# EAGLE board OpenBookReader v109 (EAGLE 9.7.0)
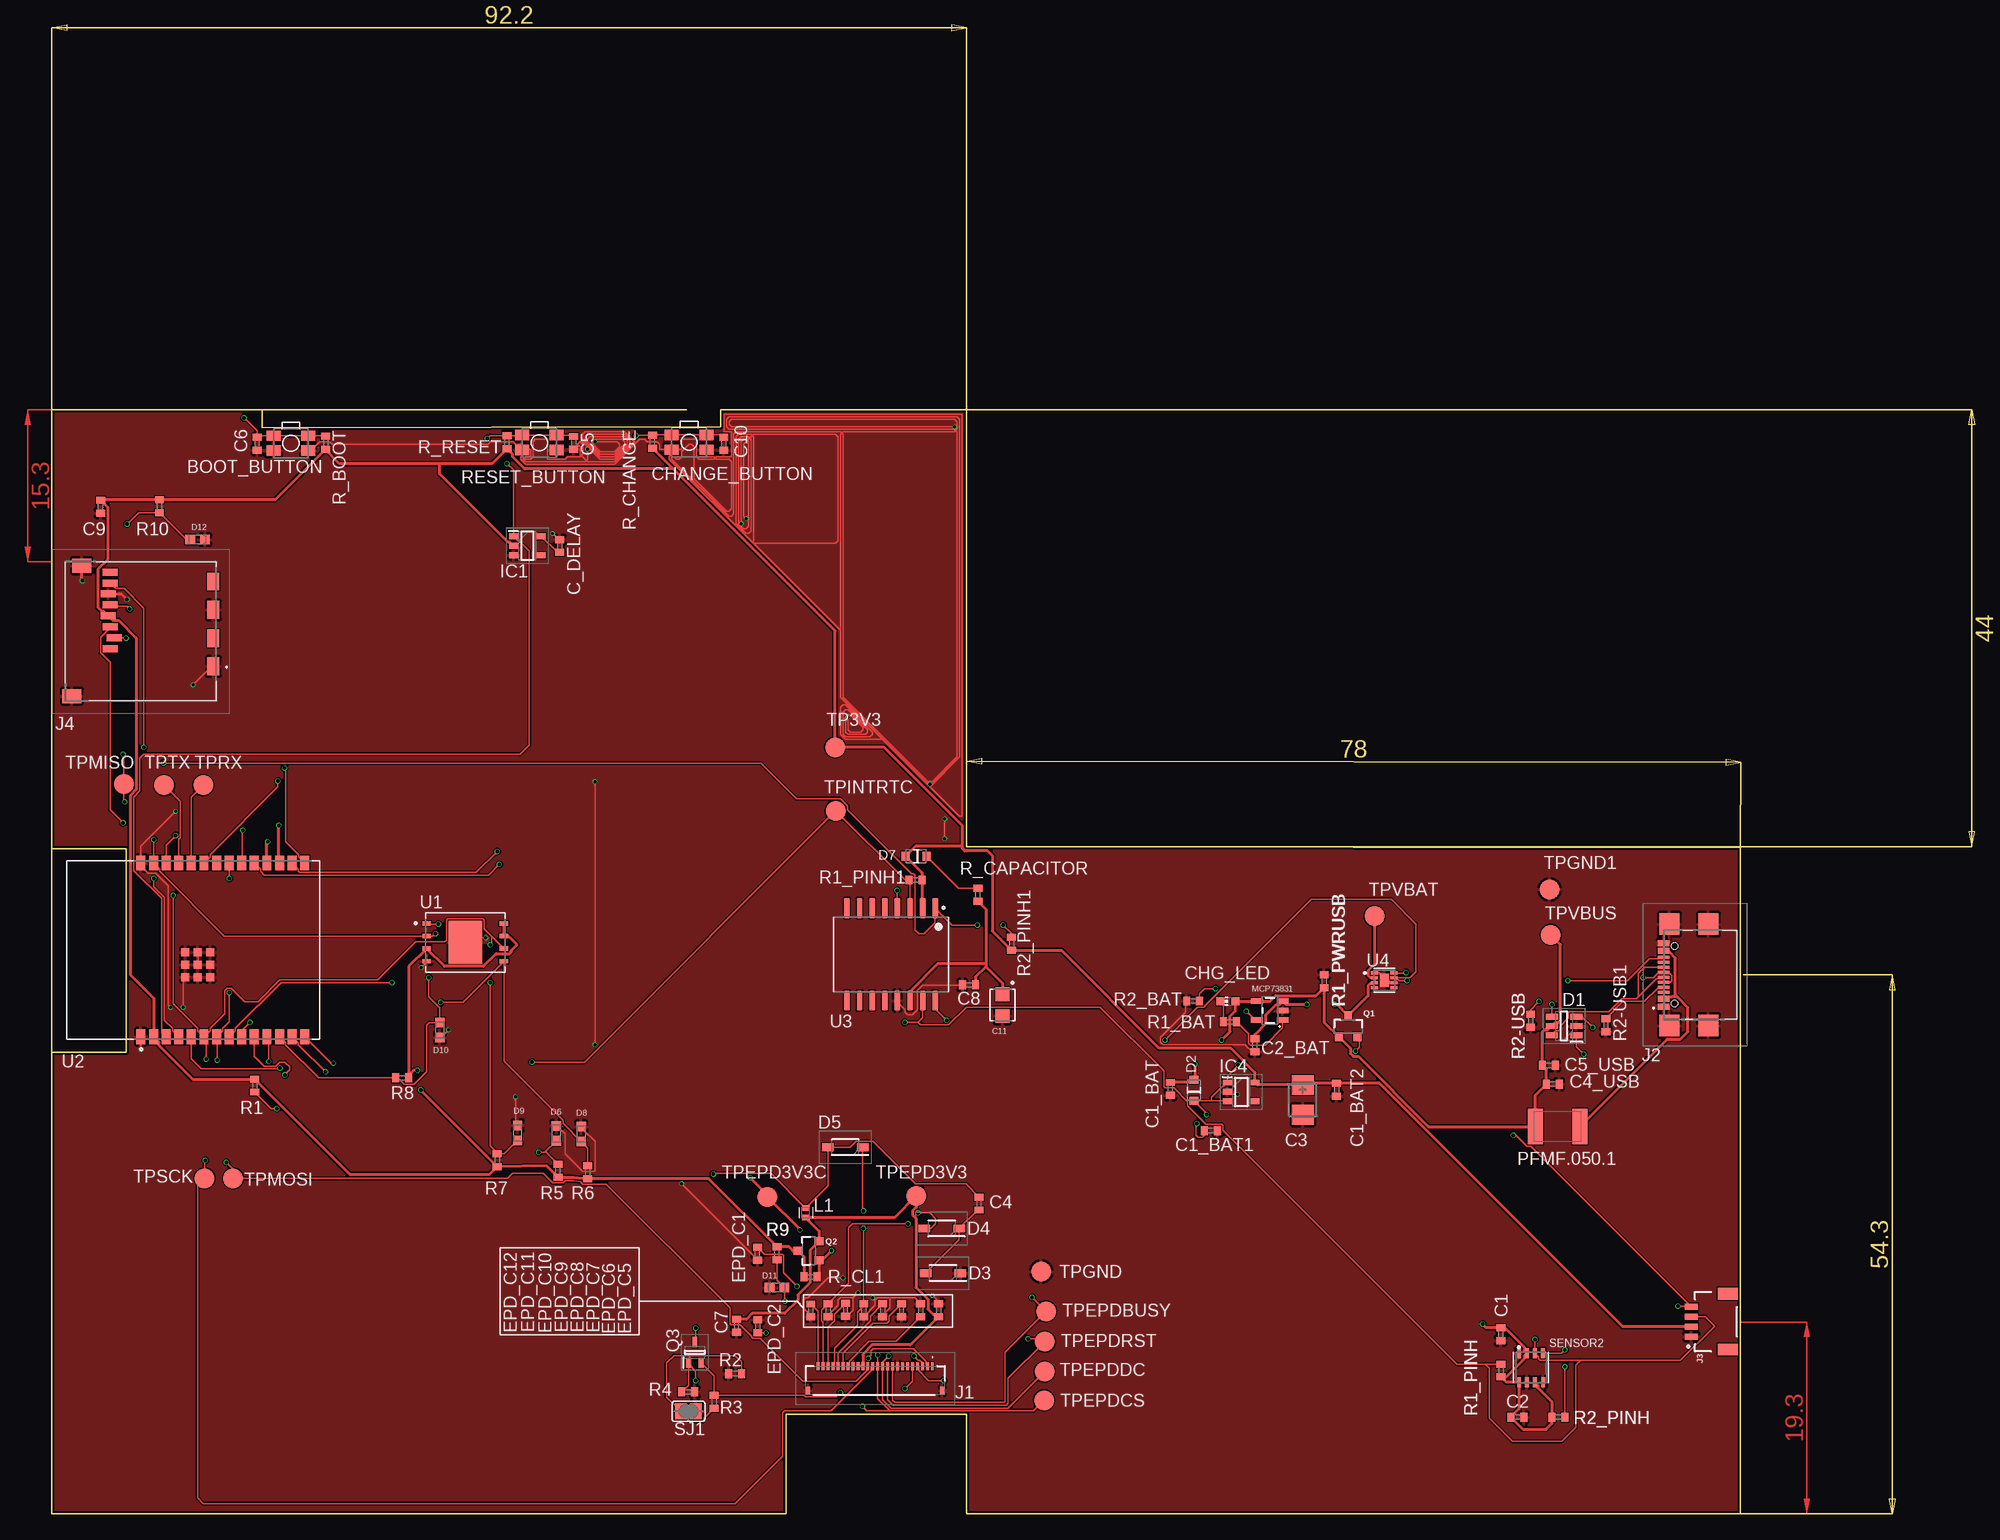
[diagram p0: board, top side]
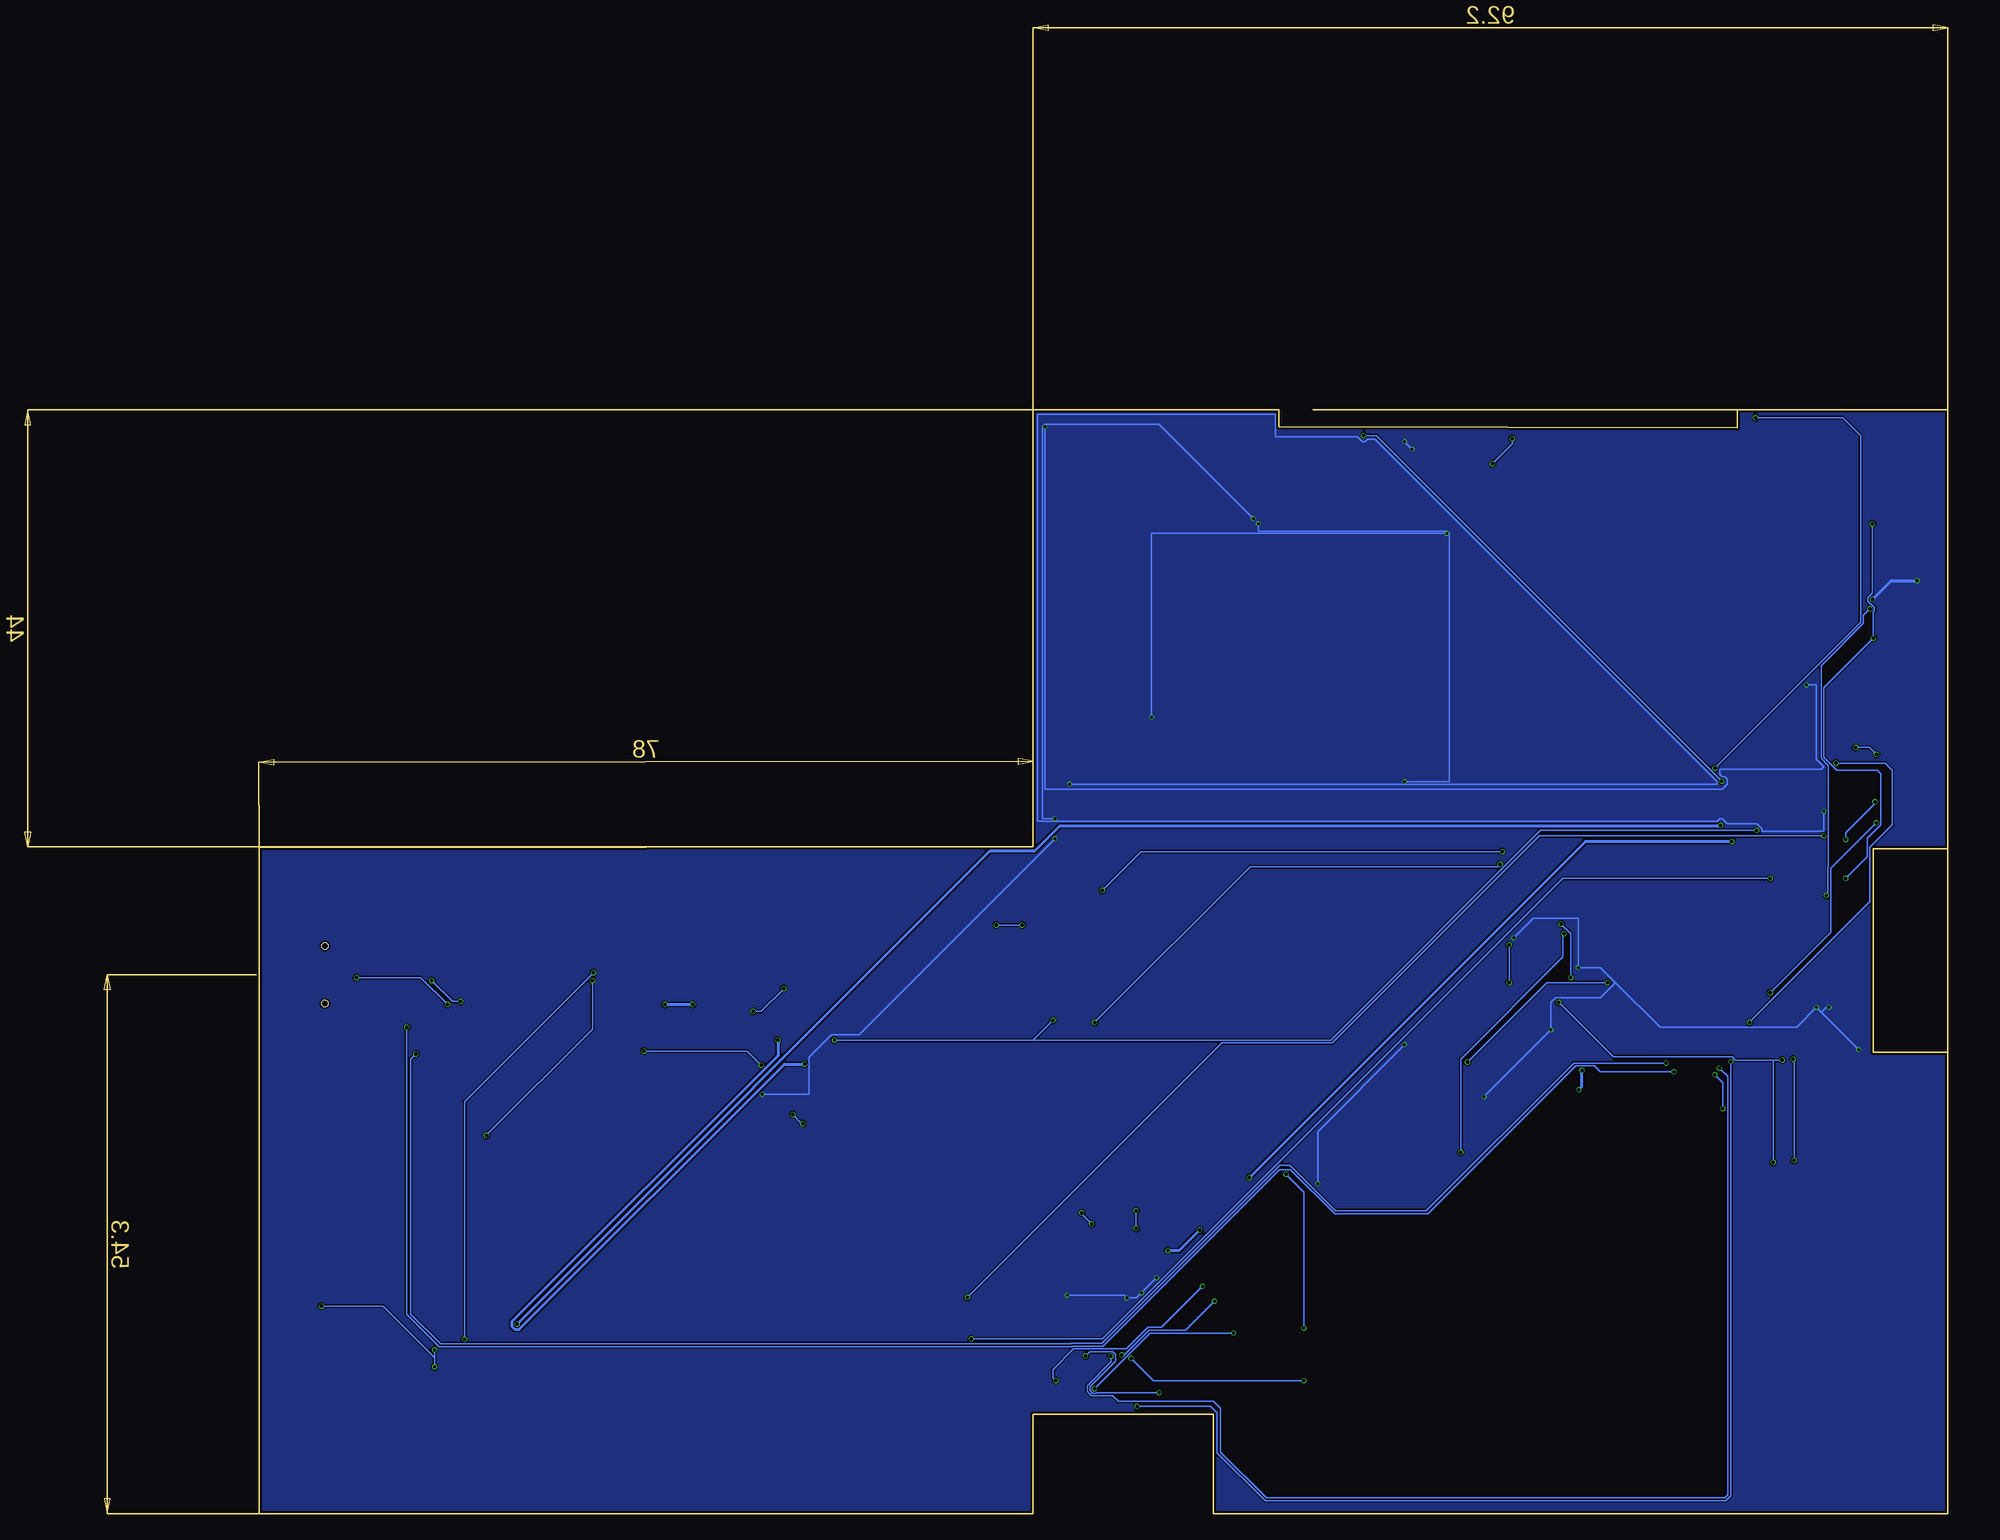
[diagram p1: board, bottom side, seen from below]

Size 170.2 x 111.2 mm. Coordinates in mm from the lower left corner, seen from the top.
Outline: 0,46.5 0,0 74,0 74,10 92.2,10 92.2,0 170.2,0 170.2,67.1 92.2,67.2 92.2,111.2 67.4,111.2 67.4,109.5 21.2,109.4 21.2,111.2 0,111.2 0,67
Outline: 0,46.5 7.5,46.5 7.5,67 0,67
Outline: 0,46.5 0,67
Copper layers (1*16): Top 0.035mm / dielectric 1.6mm / Bottom 0.035mm
Design rules "jlcpcb-2layers.dru": minimum track width 5mil, minimum drill 0.3mm, track to track 5mil, track to pad 5mil, pad to pad 5mil, via to via 5mil, smd to smd 5mil, copper to edge 0.2mm, drill to drill 6mil, minimum pad ring 10mil, minimum via ring 3mil, stop-mask expansion 4mil, vias tented up to drill 0mil, thermal gap 10mil

## Footprints (pad centres in the part's own frame; a part is rotated, then mirrored left to right if it is on the bottom)
MYBUTTON = smd 1.4 x 1.05: 1 1.75,0.75; 2 -1.75,0.75; 3 -1.75,-0.75; 4 1.75,-0.75
EAGLE-LTSPICE_C0402 = smd 0.7 x 0.9: 1 -0.65,0; 2 0.65,0
RCL_CT3528 = smd 2 x 2.2: + -1.5,0; - 1.5,0
CAPCP3225X100N = smd 1.4 x 1.4: 1 -1.1,0; 2 1.1,0
ADAFRUIT_CHIP-LED0603 = smd 0.8 x 0.8: A 0,-0.75; C 0,0.75
SOT95P280X145-6N = smd 1.2 x 0.6: 1 -1.25,0.95; 2 -1.25,0; 3 -1.25,-0.95; 4 1.25,-0.95; 5 1.25,0; 6 1.25,0.95
ESP32_WROVER_AVX---SD0805S020S1R0_AVX_SD0805S020S1R0_0 = smd 0.8 x 0.9: 1 -1.05,0; 2 1.05,0
SOD3716X135N = smd 1.15 x 0.8: 1 -1.75,0; 2 1.75,0
DIOC1608X36N = smd 0.97 x 0.94: 1 -0.75,0; 2 0.75,0
SOT95P280X125-5N = smd 0.9 x 0.6: 1 -1.4,0.95; 2 -1.4,0; 3 -1.4,-0.95; 4 1.4,-0.95; 5 1.4,0.95
SOT95P280X120-5N = smd 0.9 x 0.6: 1 -1.4,0.95; 2 -1.4,0; 3 -1.4,-0.95; 4 1.4,-0.95; 5 1.4,0.95
FH34SRJ24S05SH99 = smd 0.3 x 0.8: 1 5.75,1.45; 2 5.25,1.45; 3 4.75,1.45; 4 4.25,1.45; 5 3.75,1.45; 6 3.25,1.45; 7 2.75,1.45; 8 2.25,1.45; 9 1.75,1.45; 10 1.25,1.45; 11 0.75,1.45; 12 0.25,1.45; 13 -0.25,1.45; 14 -0.75,1.45; 15 -1.25,1.45; 16 -1.75,1.45; 17 -2.25,1.45; 18 -2.75,1.45; 19 -3.25,1.45; 20 -3.75,1.45; 21 -4.25,1.45; 22 -4.75,1.45; 23 -5.25,1.45; 24 -5.75,1.45 | smd 0.4 x 0.8: MP1 6.75,-1.05; MP2 -6.75,-1.05
SAMACSYS_PARTS_USB4110GFA = smd 0.3 x 1.15: A1 -3.35,3.678; A4 -2.55,3.678; A5 -1.25,3.678; A6 -0.25,3.678; A7 0.25,3.678; A8 1.25,3.678; A9 2.55,3.678; A12 3.35,3.678; B1 3.05,3.678; B4 2.25,3.678; B5 1.75,3.678; B6 0.75,3.678; B7 -0.75,3.678; B8 -1.75,3.678; B9 -2.25,3.678; B12 -3.05,3.678 | smd 2.18 x 2: MP1 -5.11,-0.827; MP2 5.11,-0.827; MP3 -5.11,3.103; MP4 5.11,3.103 | hole 0.65: -2.89,2.603; 2.89,2.603
JST04_1MM_RA = smd 0.6 x 1.35: 1 -1.5,0; 2 -0.5,0; 3 0.5,0; 4 1.5,0 | smd 1.2 x 2: NC1 2.8,-3.675; NC2 -2.8,-3.675
112ATAARR03ATTEND = smd 1.8 x 1.2: G1 10.6,10.4; G2 4.9,10.4; S1 7.75,10.4; S2 2.05,10.4 | smd 1.4 x 1.9: G3 13.6,-3.85; G4 0.45,-2.85 | smd 0.7 x 1.5: P1 8.8,0; P2 7.7,0.4; P3 6.6,0; P4 5.5,-0.2; P5 4.4,0; P6 3.3,-0.2; P7 2.2,0; P8 1.1,0
INDC1006X60N = smd 0.56 x 0.729: 1 -0.485,0; 2 0.485,0
ESP32_WROVER_SPARKFUN-IC-POWER_SOT23-5 = smd 0.55 x 1.2: 1 -0.95,-1.3; 2 0,-1.3; 3 0.95,-1.3; 4 0.95,1.3; 5 -0.95,1.3
ESP32C6_VARISTOR_CT/CN1812 = smd 1.5 x 3.6: 1 -2.25,0; 2 2.25,0
ESP32_WROVER_SPARKFUN-DISCRETESEMI_SOT23-3 = smd 0.8 x 0.9: 1 -0.95,-1; 2 0.95,-1; 3 0,1.1
SOT65P210X110-3N = smd 1.05 x 0.5: 1 -1.05,0.65; 2 -1.05,-0.65; 3 1.05,0
ESP32_WROVER_EAGLE-LTSPICE_R0402 = smd 0.7 x 0.9: 1 -0.65,0; 2 0.65,0
ESP32_WROVER_BME680_PSON80P300X300X100-8N = smd 1.016 x 0.5: 1 1.458,1.2; 2 1.458,0.4; 3 1.458,-0.4; 4 1.458,-1.2; 5 -1.458,-1.22; 6 -1.458,-0.4; 7 -1.458,0.4; 8 -1.458,1.2
SJ = smd 1.168 x 1.6: 1 -0.762,0; 2 0.762,0
TP20R = smd 2 x 2: TP 0,0
SON127P600X800X80-9N = smd 0.94 x 0.44: 1 -3.895,1.905; 2 -3.895,0.635; 3 -3.895,-0.635; 4 -3.895,-1.905; 5 3.895,-1.905; 6 3.895,-0.635; 7 3.895,0.635; 8 3.895,1.905 | smd 3.4 x 4.3: 9 0,0
XCVR_ESP32-C6-WROOM-1-N8 = smd 1.5 x 0.9: 1 -8.75,5.26; 2 -8.75,3.99; 3 -8.75,2.72; 4 -8.75,1.45; 5 -8.75,0.18; 6 -8.75,-1.09; 7 -8.75,-2.36; 8 -8.75,-3.63; 9 -8.75,-4.9; 10 -8.75,-6.17; 11 -8.75,-7.44; 12 -8.75,-8.71; 13 -8.75,-9.98; 14 -8.75,-11.25; 15 8.75,-11.25; 16 8.75,-9.98; 17 8.75,-8.71; 18 8.75,-7.44; 19 8.75,-6.17; 20 8.75,-4.9; 21 8.75,-3.63; 22 8.75,-2.36; 23 8.75,-1.09; 24 8.75,0.18; 25 8.75,1.45; 26 8.75,2.72; 27 8.75,3.99; 28 8.75,5.26 | smd 0.8 x 0.8: 29_1 -2.755,0.79; 29_2 -1.505,0.79; 29_3 -0.255,0.79; 29_4 -2.755,-0.46; 29_5 -1.505,-0.46; 29_6 -0.255,-0.46; 29_7 -2.755,-1.71; 29_8 -1.505,-1.71; 29_9 -0.255,-1.71
SOIC127P1032X265-16N = smd 2.05 x 0.59: 1 -4.655,4.445; 2 -4.655,3.175; 3 -4.655,1.905; 4 -4.655,0.635; 5 -4.655,-0.635; 6 -4.655,-1.905; 7 -4.655,-3.175; 8 -4.655,-4.445; 9 4.655,-4.445; 10 4.655,-3.175; 11 4.655,-1.905; 12 4.655,-0.635; 13 4.655,0.635; 14 4.655,1.905; 15 4.655,3.175; 16 4.655,4.445
SON50P200X200X80-9N = smd 0.76 x 0.27: 1 -0.985,0.75; 2 -0.985,0.25; 3 -0.985,-0.25; 4 -0.985,-0.75; 5 0.985,-0.75; 6 0.985,-0.25; 7 0.985,0.25; 8 0.985,0.75 | smd 0.9 x 1.3: 9 0,0

## Placement (x,y rotation side)
BOOT_BUTTON  BUTTON_CUSYOMV1  [MYBUTTON]  24.12,107.85 180 top
C1  100nF  [EAGLE-LTSPICE_C0402]  146.03,18.08 270 top
C1_BAT  4.7uF  [EAGLE-LTSPICE_C0402]  112.75,42.79 270 top
C1_BAT1  4.7uF  [EAGLE-LTSPICE_C0402]  116.85,38.59 0 top
C1_BAT2  4.7uF  [EAGLE-LTSPICE_C0402]  129.49,42.71 270 top
C2  100nF  [EAGLE-LTSPICE_C0402]  147.7,9.73 0 top
C2_BAT  4.7uF  [EAGLE-LTSPICE_C0402]  121.25,47.18 270 top
C3  100uF TANT  [RCL_CT3528]  126.1,41.69 270 top
C4  4.7uF/25V  [EAGLE-LTSPICE_C0402]  93.46,31.24 90 top
C4_USB  100nF  [EAGLE-LTSPICE_C0402]  151.28,43.27 0 top
C5  1uF  [EAGLE-LTSPICE_C0402]  52.61,107.87 270 top
C5_USB  4.7uF  [EAGLE-LTSPICE_C0402]  150.89,45.17 0 top
C6  100nF  [EAGLE-LTSPICE_C0402]  20.72,107.81 270 top
C7  10uF  [EAGLE-LTSPICE_C0402]  69.03,18.93 270 top
C8  100nF  [EAGLE-LTSPICE_C0402]  92.44,53.27 180 top
C9  100nF  [EAGLE-LTSPICE_C0402]  4.93,101.46 270 top
C10  100nF  [EAGLE-LTSPICE_C0402]  67.74,107.81 270 top
C11  CPH3225A  [CAPCP3225X100N]  95.82,51.24 270 top
C_DELAY  100nF  [EAGLE-LTSPICE_C0402]  51.21,97.49 90 top
CHANGE_BUTTON  BUTTON_CUSYOMV1  [MYBUTTON]  64.24,107.94 180 top
CHG_LED  [ADAFRUIT_CHIP-LED0603]  118.55,51.64 90 top
D1  USBLC6-2SC6Y  [SOT95P280X145-6N]  152.42,49.13 180 top
D2  ESP32_WROVER_AVX---SD0805S020S1R0_AVX_SD0805S020S1R0_0_0AVX_SD0805S020S1R0_0_0  [ESP32_WROVER_AVX---SD0805S020S1R0_AVX_SD0805S020S1R0_0]  115.12,42.65 90 top
D3  MBR0530  [SOD3716X135N]  89.84,24.23 180 top
D4  MBR0530  [SOD3716X135N]  89.7,28.73 180 top
D5  MBR0530  [SOD3716X135N]  79.98,36.92 180 top
D6  PGB1010603MR  [DIOC1608X36N]  50.87,38.32 270 top
D7  ESP32_WROVER_AVX---SD0805S020S1R0_AVX_SD0805S020S1R0_0_0AVX_SD0805S020S1R0_0_0  [ESP32_WROVER_AVX---SD0805S020S1R0_AVX_SD0805S020S1R0_0]  87.1,66.22 180 top
D8  PGB1010603MR  [DIOC1608X36N]  53.37,38.24 270 top
D9  PGB1010603MR  [DIOC1608X36N]  46.97,38.36 270 top
D10  PGB1010603MR  [DIOC1608X36N]  39.13,48.72 90 top
D11  PGB1010603MR  [DIOC1608X36N]  73.1,22.77 0 top
D12  PGB1010603MR  [DIOC1608X36N]  14.72,98.13 180 top
EPD_C1  1uF/50V  [EAGLE-LTSPICE_C0402]  71.13,26.2 90 top
EPD_C2  1uF/50V  [EAGLE-LTSPICE_C0402]  71.17,18.89 270 top
EPD_C5  0.1uF/50V  [EAGLE-LTSPICE_C0402]  89.39,20.49 270 top
EPD_C6  1uF/50V  [EAGLE-LTSPICE_C0402]  87.57,20.48 270 top
EPD_C7  1uF/50V  [EAGLE-LTSPICE_C0402]  85.65,20.48 90 top
EPD_C8  1uF/50V  [EAGLE-LTSPICE_C0402]  83.75,20.49 90 top
EPD_C9  1uF/50V  [EAGLE-LTSPICE_C0402]  81.85,20.5 90 top
EPD_C10  1uF/50V  [EAGLE-LTSPICE_C0402]  80.01,20.53 90 top
EPD_C11  1uF/50V  [EAGLE-LTSPICE_C0402]  78.26,20.51 90 top
EPD_C12  1uF/50V  [EAGLE-LTSPICE_C0402]  76.51,20.47 90 top
IC1  BD5229G-TR  [SOT95P280X125-5N]  47.95,97.51 0 top
IC4  XC6220A331MR-G  [SOT95P280X120-5N]  119.89,42.49 0 top
J1  FH34SRJ-24S-0.5SH_99_  [FH34SRJ24S05SH99]  83,13.42 0 top
J2  SAMACSYS_PARTS_USB4110-GF-A  [SAMACSYS_PARTS_USB4110GFA]  166.14,54.29 90 top
J3  QWIIC_RIGHT_ANGLE  [JST04_1MM_RA]  165.25,19.34 90 top
J4  112A-TAAR-R03_ATTEND  [112ATAARR03ATTEND]  5.89,95.96 270 top
L1  68uH  [INDC1006X60N]  76,30.3 90 top
MCP73831  ESP32_WROVER_SPARKFUN-IC-POWER_MCP73831  [ESP32_WROVER_SPARKFUN-IC-POWER_SOT23-5]  122.76,50.69 90 top
PFMF.050.1  ESP32C6_VARISTORCN1812  [ESP32C6_VARISTOR_CT/CN1812]  151.76,39 180 top
Q1  20V/4.2A/52mΩ/1.4W  [ESP32_WROVER_SPARKFUN-DISCRETESEMI_SOT23-3]  130.66,49.06 0 top
Q2  20V/4.2A/52mΩ/1.4W  [ESP32_WROVER_SPARKFUN-DISCRETESEMI_SOT23-3]  76.34,26.48 90 top
Q3  SI1308EDL-T1-GE3  [SOT65P210X110-3N]  64.82,16.25 90 top
R1  10K  [ESP32_WROVER_EAGLE-LTSPICE_R0402]  20.47,43.13 90 top
R1_BAT  200  [ESP32_WROVER_EAGLE-LTSPICE_R0402]  118.73,49.55 0 top
R1_PINH  10K  [ESP32_WROVER_EAGLE-LTSPICE_R0402]  146.07,14.42 270 top
R1_PINH1  19K  [ESP32_WROVER_EAGLE-LTSPICE_R0402]  87.06,63.84 0 top
R1_PWRUSB  100K  [ESP32_WROVER_EAGLE-LTSPICE_R0402]  128.24,53.65 270 top
R2  2.2  [ESP32_WROVER_EAGLE-LTSPICE_R0402]  68.87,14.11 0 top
R2-USB  5k1  [ESP32_WROVER_EAGLE-LTSPICE_R0402]  149.05,49.65 270 top
R2-USB1  5k1  [ESP32_WROVER_EAGLE-LTSPICE_R0402]  156.63,49.22 90 top
R2_BAT  2K  [ESP32_WROVER_EAGLE-LTSPICE_R0402]  115.04,51.65 0 top
R2_PINH  10K  [ESP32_WROVER_EAGLE-LTSPICE_R0402]  151.84,9.73 180 top
R2_PINH1  10K  [ESP32_WROVER_EAGLE-LTSPICE_R0402]  96.74,57.4 270 top
R3  0.47  [ESP32_WROVER_EAGLE-LTSPICE_R0402]  66.77,11.29 90 top
R4  10K  [ESP32_WROVER_EAGLE-LTSPICE_R0402]  64.15,12.27 180 top
R5  10K  [ESP32_WROVER_EAGLE-LTSPICE_R0402]  51.03,34.53 270 top
R6  10K  [ESP32_WROVER_EAGLE-LTSPICE_R0402]  54.03,34.41 270 top
R7  10K  [ESP32_WROVER_EAGLE-LTSPICE_R0402]  44.91,35.61 270 top
R8  10K  [ESP32_WROVER_EAGLE-LTSPICE_R0402]  35.31,43.91 0 top
R9  10K  [ESP32_WROVER_EAGLE-LTSPICE_R0402]  73.09,26.23 90 top
R10  10K  [ESP32_WROVER_EAGLE-LTSPICE_R0402]  10.87,101.51 90 top
R_BOOT  10K  [ESP32_WROVER_EAGLE-LTSPICE_R0402]  27.63,107.91 270 top
R_CAPACITOR  15  [ESP32_WROVER_EAGLE-LTSPICE_R0402]  93.34,62.35 270 top
R_CHANGE  10K  [ESP32_WROVER_EAGLE-LTSPICE_R0402]  60.56,107.99 270 top
R_CL1  10K  [ESP32_WROVER_EAGLE-LTSPICE_R0402]  76.47,23.85 180 top
R_RESET  10K  [ESP32_WROVER_EAGLE-LTSPICE_R0402]  45.89,107.96 270 top
RESET_BUTTON  BUTTON_CUSYOMV1  [MYBUTTON]  49.15,107.9 180 top
SENSOR2  BME688  [ESP32_WROVER_BME680_PSON80P300X300X100-8N]  149.08,14.71 90 top
SJ1  [SJ]  64.18,10.31 180 top
TP3V3  TPTP20R  [TP20R]  78.97,77.21 0 top
TPEPD3V3  TPTP20R  [TP20R]  87.12,32.01 0 top
TPEPD3V3C  TPTP20R  [TP20R]  72.12,31.91 0 top
TPEPDBUSY  TPTP20R  [TP20R]  100.23,20.39 0 top
TPEPDCS  TPTP20R  [TP20R]  100.02,11.41 0 top
TPEPDDC  TPTP20R  [TP20R]  100.07,14.31 0 top
TPEPDRST  TPTP20R  [TP20R]  100.09,17.33 0 top
TPGND  TPTP20R  [TP20R]  99.73,24.39 0 top
TPGND1  TPTP20R  [TP20R]  150.95,62.89 0 top
TPINTRTC  TPTP20R  [TP20R]  79.02,70.81 0 top
TPMISO  TPTP20R  [TP20R]  7.27,73.49 0 top
TPMOSI  TPTP20R  [TP20R]  18.29,33.79 0 top
TPRX  TPTP20R  [TP20R]  15.29,73.39 0 top
TPSCK  TPTP20R  [TP20R]  15.41,33.79 0 top
TPTX  TPTP20R  [TP20R]  11.34,73.41 0 top
TPVBAT  TPTP20R  [TP20R]  133.31,60.19 0 top
TPVBUS  TPTP20R  [TP20R]  151.07,58.31 0 top
U1  W25Q512JVEIQ  [SON127P600X800X80-9N]  41.69,57.56 0 top
U2  ESP32-C6-WROOM-1-N8  [XCVR_ESP32-C6-WROOM-1-N8]  14.26,56.8 90 top
U3  DS3231SN#  [SOIC127P1032X265-16N]  84.6,56.35 270 top
U4  MAX17048G+T10  [SON50P200X200X80-9N]  134.3,53.72 0 top

## Library data of the parts
BOOT_BUTTON CHANGE_BUTTON CHG_LED PFMF.050.1 RESET_BUTTON SJ1 TP3V3 TPEPD3V3 TPEPD3V3C TPEPDBUSY TPEPDCS TPEPDDC TPEPDRST TPGND TPGND1 TPINTRTC TPMISO TPMOSI TPRX TPSCK TPTX TPVBAT TPVBUS = DeskAssistant v19 v1
C1 C1_BAT C1_BAT1 C1_BAT2 C2 C2_BAT C4 C4_USB C5 C5_USB C6-C10 C_DELAY EPD_C1 EPD_C2 EPD_C5-EPD_C12 = DeskAssistant v19 v1; SPICEMODEL: NONE; SPICEPREFIX: C
C3 = DeskAssistant v19 v1; SPICEPREFIX: C
C11 = DeskAssistant v19 v1; AVAILABILITY: Not in stock; CHECK_PRICES: https://www.snapeda.com/parts/CPH3225A/Seiko+Instruments/view-part/?ref=eda; DESCRIPTION: 11 mF (EDLC) Supercapacitor 3.3 V 1210 (3225 Metric) - -; MF: Seiko Instruments; MP: CPH3225A; PACKAGE: 1210 Seiko; PRICE: None; PURCHASE-URL: https://www.snapeda.com/api/url_track_click_mouser/?unipart_id=562593&manufacturer=Seiko Instruments&part_name=CPH3225A&search_term=None; SNAPEDA_LINK: https://www.snapeda.com/parts/CPH3225A/Seiko+Instruments/view-part/?ref=snap
D1 = DeskAssistant v19 v1; AVAILABILITY: In Stock; CHECK_PRICES: https://www.snapeda.com/parts/USBLC6-2SC6Y/STMicroelectronics/view-part/?ref=eda; DESCRIPTION: 17V Clamp 5A (8/20µs) Ipp Tvs Diode Surface Mount SOT-23-6; MF: STMicroelectronics; MP: USBLC6-2SC6Y; PACKAGE: SOT-23-6 STMicroelectronics; PRICE: None; SNAPEDA_LINK: https://www.snapeda.com/parts/USBLC6-2SC6Y/STMicroelectronics/view-part/?ref=snap
D2 D7 = DeskAssistant v19 v1; CENTROID_NOT_SPECIFIED: No; DATASHEET: http://datasheets.avx.com/schottky.pdf; DIGIKEY_DESCRIPTION: DIODE SCHOTTKY 20V 1A 0805; DIGIKEY_PART_NUMBER: 478-7800-1-ND; LEAD_FREE: yes; MF: AVX; MOUSER_PART_NUMBER: 581-SD0805S020S1R0; PACKAGE: 0805 (2012 metric); PREFIX: D; ROHS: yes; TEMPERATURE_RANGE_HIGH: +125°C; TEMPERATURE_RANGE_LOW: -55°C
D3-D5 = DeskAssistant v19 v1; AVAILABILITY: In Stock; CHECK_PRICES: https://www.snapeda.com/parts/MBR0530/Onsemi/view-part/?ref=eda; DESCRIPTION: Diode Schottky 30 V 500mA Surface Mount SOD-123; MF: ON Semiconductor; MP: MBR0530; PACKAGE: SOD-123-2 ON Semiconductor; PRICE: None; PURCHASE-URL: https://www.snapeda.com/api/url_track_click_mouser/?unipart_id=179458&manufacturer=ON Semiconductor&part_name=MBR0530&search_term=None; SNAPEDA_LINK: https://www.snapeda.com/parts/MBR0530/Onsemi/view-part/?ref=snap
D6 D8-D12 = DeskAssistant v19 v1; AVAILABILITY: In Stock; CHECK_PRICES: https://www.snapeda.com/parts/PGB1010603MR/Littelfuse/view-part/?ref=eda; DESCRIPTION: 150V (Typ) Clamp - Ipp Tvs Diode Surface Mount 0603 (1608 Metric); MF: Littelfuse Inc.; MP: PGB1010603MR; PACKAGE: 0603 Littelfuse Inc.; PRICE: None; PURCHASE-URL: https://www.snapeda.com/api/url_track_click_mouser/?unipart_id=5659453&manufacturer=Littelfuse Inc.&part_name=PGB1010603MR&search_term=None; SNAPEDA_LINK: https://www.snapeda.com/parts/PGB1010603MR/Littelfuse/view-part/?ref=snap
IC1 = DeskAssistant v19 v1; DESCRIPTION: Voltage Detector with Adjustable Delay Time: CMOS processes are utilized to develop high precision, low current consumption CMOS reset ICs that allow arbitrary setting of the delay time. The extensive lineup includes both Nch Open Drain and CMOS output types in a wide range of detection voltages (from 2.3V to 6.0V, in 0.1V steps), enabling selection of the ideal solution based on customer requirements. In addition, the entire series is of course both lead-free and RoHS-compliant.; HEIGHT: 1.25mm; MANUFACTURER_NAME: ROHM Semiconductor; MANUFACTURER_PART_NUMBER: BD5229G-TR; MOUSER_PART_NUMBER: 755-BD5229G-TR; MOUSER_PRICE-STOCK: https://www.mouser.co.uk/ProductDetail/ROHM-Semiconductor/BD5229G-TR?qs=4kLU8WoGk0vvnhrrYwdszw%3D%3D
IC4 = DeskAssistant v19 v1; DESCRIPTION: LDO Voltage Regulators; HEIGHT: 1.2mm; MANUFACTURER_NAME: Torex; MANUFACTURER_PART_NUMBER: XC6220A331MR-G; MOUSER_PART_NUMBER: 865-XC6220A331MR-G; MOUSER_PRICE-STOCK: https://www.mouser.co.uk/ProductDetail/Torex-Semiconductor/XC6220A331MR-G?qs=AsjdqWjXhJ8ZSWznL1J0gg%3D%3D
J1 = DeskAssistant v19 v1; DESCRIPTION: 24 Position FFC, FPC Connector Contacts, Top and Bottom 0.020" (0.50mm) Surface Mount, Right Angle; HEIGHT: 1.1mm; MANUFACTURER_NAME: Hirose; MANUFACTURER_PART_NUMBER: FH34SRJ-24S-0.5SH(99); MOUSER_PART_NUMBER: 798-FH34SRJ24S05SH99; MOUSER_PRICE-STOCK: https://www.mouser.co.uk/ProductDetail/Hirose-Connector/FH34SRJ-24S-0.5SH99?qs=vcbW%252B4%252BSTIpKBl5ap9J8Fw%3D%3D
J2 = DeskAssistant v19 v1; DESCRIPTION: CONN USB 2.0 TYPE-C R/A SMT; HEIGHT: 3.26mm; MANUFACTURER_NAME: GCT (GLOBAL CONNECTOR TECHNOLOGY); MANUFACTURER_PART_NUMBER: USB4110-GF-A; MOUSER_PART_NUMBER: 640-USB4110-GF-A; MOUSER_PRICE-STOCK: https://www.mouser.co.uk/ProductDetail/GCT/USB4110-GF-A?qs=KUoIvG%2F9IlYiZvIXQjyJeA%3D%3D
J3 = DeskAssistant v19 v1; PROD_ID: CONN-13694
J4 = DeskAssistant v19 v1; DESCRIPTION: Micro SD Card Socket, Push-Push Type, Top Mount, SMT, H=1.83mm, 10u; HEIGHT: 1.9mm; MANUFACTURER_NAME: ATTEND; MANUFACTURER_PART_NUMBER: 112A-TAAR-R03 ATTEND
L1 = Tinkercad; CATEGORY: Inductor; SUB-CATEGORY: Fixed
MCP73831 = DeskAssistant v19 v1; PROD_ID: IC-09995
Q1 Q2 = DeskAssistant v19 v1; PROD_ID: TRAN-14388
Q3 = DeskAssistant v19 v1; AVAILABILITY: In Stock; CHECK_PRICES: https://www.snapeda.com/parts/SI1308EDL-T1-GE3/Vishay+Siliconix/view-part/?ref=eda; DESCRIPTION: Si1308EDL-T1-GE3 N-channel MOSFET Transistor, 1.5 A, 30 V, 3-Pin SC-70 | Siliconix / Vishay SI1308EDL-T1-GE3; MF: Vishay Siliconix; MP: SI1308EDL-T1-GE3; PACKAGE: SOT-323 Vishay Semiconductor; PRICE: None; PURCHASE-URL: https://www.snapeda.com/api/url_track_click_mouser/?unipart_id=274603&manufacturer=Vishay Siliconix&part_name=SI1308EDL-T1-GE3&search_term=None; SNAPEDA_LINK: https://www.snapeda.com/parts/SI1308EDL-T1-GE3/Vishay+Siliconix/view-part/?ref=snap
R1 R1_BAT R1_PINH R1_PINH1 R1_PWRUSB R2 R2-USB R2-USB1 R2_BAT R2_PINH R2_PINH1 R3-R10 R_BOOT R_CAPACITOR R_CHANGE R_CL1 R_RESET = DeskAssistant v19 v1; SPICEMODEL: NONE; SPICEPREFIX: R
SENSOR2 = DeskAssistant v19 v1; AVAILABILITY: Unavailable; DESCRIPTION: Integrated Environmental Unit; MF: Bosch Sensortec; MP: BME680; PACKAGE: LGA-8 Bosch Tools; PRICE: None
U1 = DeskAssistant v19 v1; AVAILABILITY: In Stock; CHECK_PRICES: https://www.snapeda.com/parts/W25Q512JVEIQ/Winbond+Electronics/view-part/?ref=eda; DESCRIPTION: FLASH - NOR Memory IC 512Mb (64M x 8) SPI - Quad I/O 133 MHz 8-WSON (8x6); MF: Winbond Electronics; MP: W25Q512JVEIQ; PACKAGE: Package; PRICE: None; SNAPEDA_LINK: https://www.snapeda.com/parts/W25Q512JVEIQ/Winbond+Electronics/view-part/?ref=snap
U2 = DeskAssistant v19 v1; AVAILABILITY: In Stock; CHECK_PRICES: https://www.snapeda.com/parts/ESP32-C6-WROOM-1-N8/Espressif+Systems/view-part/?ref=eda; DESCRIPTION: Multiprotocol Modules ESP32-C6 module, Wi-Fi 6 in 2.4 GHz band, Bluetooth 5, Zigbee 3.0 and Thread. ESP34-WROOM Compatible - ENGINEERING SAMPLE; MF: Espressif Systems; MP: ESP32-C6-WROOM-1-N8; PACKAGE: None; PRICE: None; SNAPEDA_LINK: https://www.snapeda.com/parts/ESP32-C6-WROOM-1-N8/Espressif+Systems/view-part/?ref=snap
U3 = DeskAssistant v19 v1; AVAILABILITY: In Stock; CHECK_PRICES: https://www.snapeda.com/parts/DS3231SN%23/Analog+Devices/view-part/?ref=eda; DESCRIPTION: Extremely Accurate I²C-Integrated RTC/TCXO/Crystal; MF: Analog Devices; MP: DS3231SN#; PACKAGE: SOIC-16 Maxim; PRICE: None; PURCHASE-URL: https://www.snapeda.com/api/url_track_click_mouser/?unipart_id=99048&manufacturer=Analog Devices&part_name=DS3231SN#&search_term=None; SNAPEDA_LINK: https://www.snapeda.com/parts/DS3231SN%23/Analog+Devices/view-part/?ref=snap
U4 = DeskAssistant v19 v1; AVAILABILITY: In Stock; CHECK_PRICES: https://www.snapeda.com/parts/MAX17048G+T10/Analog+Devices/view-part/?ref=eda; DESCRIPTION: 3µA 1-Cell/2-Cell Fuel Gauge with ModelGauge; MF: Analog Devices; MP: MAX17048G+T10; PACKAGE: TDFN-8 Maxim; PRICE: None; PURCHASE-URL: https://www.snapeda.com/api/url_track_click_mouser/?unipart_id=329239&manufacturer=Analog Devices&part_name=MAX17048G+T10&search_term=None; SNAPEDA_LINK: https://www.snapeda.com/parts/MAX17048G+T10/Analog+Devices/view-part/?ref=snap

## Nets
3V3: C1_BAT2.1 C3.+ C9.1 D7.2 IC1.2 IC4.5 J3.2 J4.P4 Q2.3 R1.2 R1_PINH1.2 R2_PINH1.2 R5.2 R6.2 R7.2 R8.2 R9.2 R10.2 R_BOOT.2 R_CHANGE.2 R_CL1.2 R_RESET.2 TP3V3.TP U1.3 U1.7 U1.8 U2.2 U3.2
32KHZ: R2_PINH1.1 U2.9 U3.1
DN: D1.4 J2.A7 J2.B7
DP: D1.6 J2.A6 J2.B6
EPD_3V3: C7.1 EPD_C5.2 J1.15 J1.16 L1.1 Q2.2 TPEPD3V3.TP
EPD_3V3_C: Q2.1 R_CL1.1 TPEPD3V3C.TP U2.18
EPD_BUSY: J1.9 TPEPDBUSY.TP U2.26
EPD_CS: D11.2 J1.12 R9.1 TPEPDCS.TP U2.11
EPD_DC: J1.11 TPEPDDC.TP U2.5
EPD_RST: J1.10 TPEPDRST.TP U2.21
FLASH_CS: D10.2 R8.1 U1.1 U2.12
GDR: J1.2 Q3.1 R4.2
GND: BOOT_BUTTON.1 BOOT_BUTTON.2 C1.2 C1_BAT1.2 C1_BAT2.2 C1_BAT.2 C2.2 C2_BAT.2 C3.- C4_USB.2 C5.2 C5_USB.2 C6.2 C7.2 C8.2 C9.2 C10.2 C11.2 C_DELAY.2 CHANGE_BUTTON.1 CHANGE_BUTTON.2 D1.2 D3.1 D6.1 D8.1 D9.1 D10.1 D11.1 D12.1 EPD_C1.1 EPD_C2.1 EPD_C5.1 EPD_C6.1 EPD_C7.1 EPD_C8.1 EPD_C9.1 EPD_C10.1 EPD_C11.1 EPD_C12.1 IC1.3 IC4.2 J1.8 J1.17 J1.MP1 J1.MP2 J2.A1 J2.A12 J2.B1 J2.B12 J2.MP1 J2.MP2 J2.MP3 J2.MP4 J3.1 J4.G1 J4.G2 J4.G3 J4.G4 J4.P6 MCP73831.2 R1_PWRUSB.1 R2-USB1.1 R2-USB.2 R2.1 R2_BAT.1 R4.1 RESET_BUTTON.1 RESET_BUTTON.2 SENSOR2.1 SENSOR2.5 SENSOR2.7 SJ1.1 TPGND1.TP TPGND.TP U1.4 U1.9 U2.1 U2.28 U2.29_1 U2.29_2 U2.29_3 U2.29_4 U2.29_5 U2.29_6 U2.29_7 U2.29_8 U2.29_9 U3.13 U4.1 U4.4 U4.6 U4.9
GPIO8: R1.1 U2.10
I2C_PW: C1.1 C2.1 R1_PINH.2 R2_PINH.2 SENSOR2.2 SENSOR2.6 SENSOR2.8 U2.17
INT_RTC: R1_PINH1.1 TPINTRTC.TP U2.8 U3.3
IO/BOOT: BOOT_BUTTON.3 BOOT_BUTTON.4 C6.1 R_BOOT.1 U2.15
IO/CHANGE: C10.1 CHANGE_BUTTON.3 CHANGE_BUTTON.4 R_CHANGE.1 U2.23
MISO: D6.2 J4.P7 R5.1 TPMISO.TP U1.2 U2.27
MOSI: D8.2 J1.14 J4.P3 R6.1 TPMOSI.TP U1.5 U2.7
N$1: J2.A5 R2-USB1.2
N$2: J2.B5 R2-USB.1
N$3: C1_BAT1.1 D2.1 IC4.1 IC4.3 Q1.2
N$4: MCP73831.1 R1_BAT.2
N$5: C4.1 D3.2 D4.1
N$6: CHG_LED.C R1_BAT.1
N$7: MCP73831.5 R2_BAT.2
N$8: EPD_C12.2 J1.24
N$9: EPD_C10.2 J1.22
N$10: EPD_C8.2 J1.20
N$11: EPD_C7.2 J1.19
N$12: EPD_C6.2 J1.18
N$13: EPD_C2.2 J1.5
N$14: EPD_C1.2 J1.4
N$15: C_DELAY.1 IC1.5
N$16: D7.1 R_CAPACITOR.1
PREVGH: D5.1 EPD_C9.2 J1.21
PREVGL: D4.2 EPD_C11.2 J1.23
RESE: J1.3 Q3.2 R3.2
RESE': R2.2 R3.1 SJ1.2
RESET: C5.1 IC1.1 R_RESET.1 RESET_BUTTON.3 RESET_BUTTON.4 U2.3
RTC_RST: U2.16 U3.4
RX: TPRX.TP U2.24
SCK: D9.2 J1.13 J4.P5 R7.1 TPSCK.TP U1.6 U2.6
SCL: J3.4 R2_PINH.1 SENSOR2.4 U2.20 U3.16 U4.7
SDA: J3.3 R1_PINH.1 SENSOR2.3 U2.19 U3.15 U4.8
SRC: C4.2 D5.2 L1.2 Q3.3
SS_SD: D12.2 J4.P2 R10.1 U2.4
TX: TPTX.TP U2.25
USB_D+: D1.1 U2.14
USB_D-: D1.3 U2.13
VBAT: C2_BAT.1 MCP73831.3 Q1.3 TPVBAT.TP U4.2 U4.3
VBUS: C1_BAT.1 C4_USB.1 C5_USB.1 CHG_LED.A D1.5 D2.2 MCP73831.4 PFMF.050.1.2 Q1.1 R1_PWRUSB.2 TPVBUS.TP
VRTC: C8.1 C11.1 R_CAPACITOR.2 U3.14
VUSB: J2.A4 J2.A9 J2.B4 J2.B9 PFMF.050.1.1

## Tracks (layer width: path | path; a pad name or v marks a point on that pad's centre or on a via)
3V3  (via drill 0.35)
  Top 0.3: 91.77,67.3 91.77,67.02 92.02,66.77 92.2,66.77 94.33,66.77 94.8,66.3 94.8,58.69 R2_PINH1.2 101.75,56.75 111.6,46.9 118.83,46.9 121.29,44.44 IC4.5 121.54,43.19 C3.+ 126.27,43.36 C1_BAT2.1 133.81,43.36 158.33,18.84 J3.2 | 91.77,67.3 91.77,69.33 83.89,77.21 TP3V3.TP 78.97,88.93 62.65,105.25 | 62.65,105.25 R_CHANGE.2 | U3.2 87.71,61.07 R1_PINH1.2 87.71,64.56 D7.2 87.13,67.3 91.77,67.3 | 62.65,105.25 47.69,105.25 46.42,106.51 46.42,106.78 R_RESET.2 44.38,105.8 39.1,105.8 | 39.1,105.8 29,105.8 27.63,107.17 R_BOOT.2 26.84,106.47 26.84,106.46 22.55,102.16 R10.2 4.98,102.16 C9.1 5.66,101.38 5.66,96.12 4.67,95.12 4.67,91.3 5.03,90.93 5.22,90.93 J4.P4 6.17,89.99 6.76,89.99 8.55,88.2 8.55,72.96 7.93,72.34 7.93,54.27 10.27,51.93 U2.2 10.81,47.51 10.81,47.19 14.22,43.78 R1.2 30.05,34.2 44.15,34.2 R7.2 | R7.2 49.87,35.04 R5.2 52.61,33.88 R6.2 66.21,33.76 R9.2 74.31,26.88 74.71,26.48 Q2.3 75.82,25.9 R_CL1.2 | 36,44.2 36,55.13 U1.3 39.59,55.13 43.51,55.13 44.8,56.43 46.14,56.43 46.33,56.62 46.33,56.73 46.9,57.3 46,58.2 U1.7 | 36,44.2 36,43.95 R8.2 | U1.7 | U1.7 U1.8 | R7.2 37.2,42.67 v37.2,42.7 | IC1.2 46.18,97.88 45.98,97.88 39.1,104.77 39.1,105.8 | v36.88,44.67 36.47,44.67 36,44.2
  Bottom 0.3: v37.2,42.7 36.9,43 36.9,44.65 v36.88,44.67
32KHZ  (via drill 0.35)
  Top 0.152: v93.3,59.3 90.75,59.3 U3.1 89.05,59.55 87.9,58.4 87.4,58.4 87,58.8 87,64.33 86.84,64.49 86.64,64.49 80.22,70.91 80.22,71.31 79.52,72.01 75.09,72.01 71.5,75.6 11.3,75.6 v11.28,75.62 | v95.9,59.3 96.74,58.46 R2_PINH1.1 | v20,49.5 19.16,48.66 U2.9
  Bottom 0.152: v20,49.5 7.85,61.65 7.85,67.15 5.6,69.4 5.6,74.9 6.3,75.6 11.26,75.6 v11.28,75.62 | v93.3,59.3 v95.9,59.3
DN  (via drill 0.35)
  Top 0.152: D1.4 151.17,51.27 v151.2,51.3 | J2.B7 163.14,53.54 163.3,53.7 163.3,54.21 163.12,54.39 162.61,54.39 J2.A7 162.31,54.39 161.8,54.39 161.41,54 v160.38,54
  Bottom 0.152: v151.2,51.3 153.9,54 v160.38,54
DP
  Top 0.152: J2.A6 162.31,53.89 161.74,53.89 159.92,52.08 | D1.6 151.62,48.63 151.85,48.63 151.97,48.75 151.97,49.07 152.87,49.97 152.87,50.46 152.99,50.58 156.95,50.58 158.24,51.88 159.73,51.88 159.92,52.08 | 159.92,52.08 159.92,54.42 160.54,55.04 J2.B6
EPD_3V3
  Top 0.3: C7.1 70.02,19.58 70.61,20.17 73.87,20.17 75.2,21.5 75.2,22.04 76.45,23.29 76.45,26.54 Q2.2 77.34,28.48 L1.1 84.92,29.82 TPEPD3V3.TP 87.12,30.87 86.77,30.52 86.77,30.08 87.1,29.75 87.1,22.79 88.3,21.59 88.3,20.6 89.22,19.68 | EPD_C5.2 89.22,19.68 | 89.22,19.68 86.55,17 82.7,17 81.75,16.05 J1.15 J1.16
EPD_3V3_C  (via drill 0.35)
  Top 0.3: U2.18 21.7,67.6 v21.8,67.7 | v75.4,28.6 75.4,28.63 TPEPD3V3C.TP 72.12,32.13 v70.4,33.85 | v78.6,26.5 77.63,25.53 Q2.1 77.34,24.07 R_CL1.1
  Bottom 0.3: v75.4,28.6 77.5,26.5 v78.6,26.5 | v21.8,67.7 36.55,67.7 v70.4,33.85
EPD_BUSY  (via drill 0.35)
  Top 0.152: J1.9 84.75,11.45 85,11.2 96,11.2 96.1,11.3 96.1,16.26 TPEPDBUSY.TP 98.82,21.8 v98.8,21.8 | v12.5,68.3 11.54,67.34 U2.26
  Bottom 0.152: v12.5,68.3 41.16,68.3 62.04,47.42 73.18,47.42 v98.8,21.8
EPD_CS  (via drill 0.35)
  Top 0.152: TPEPDCS.TP 98.96,10.35 84.48,10.35 84.47,10.37 | 84.47,10.37 83.25,11.59 J1.12 83.24,14.88 v83.24,16.01 | v73.9,21.4 73.85,21.45 D11.2 73.09,23.53 R9.1 | 84.47,10.37 82.13,10.37 v81.7,10.8 | U2.11 21.9,47.85 v21.9,45.55
  Bottom 0.152: v81.7,10.8 74.3,10.8 73.65,10.15 73.65,6.15 68.8,1.3 22.4,1.3 21.9,1.8 v21.9,45.55 | v73.9,21.4 76.82,18.48 80.52,18.48 82.99,16.01 v83.24,16.01
EPD_DC  (via drill 0.35)
  Top 0.152: TPEPDDC.TP 96.39,10.63 84.6,10.63 83.75,11.48 J1.11 83.75,15.26 v84.35,15.87 | v23.02,44.88 22.77,44.88 22.72,44.82 15.08,44.82 14.08,45.82 U2.5
  Bottom 0.152: v23.02,44.88 22.2,44.06 22.2,1.9 22.5,1.6 68.7,1.6 73.3,6.2 73.3,10.6 74,11.3 83.6,11.3 84.17,11.87 86.3,11.87 86.73,12.3 86.73,12.9 84.35,15.28 v84.35,15.87
EPD_RST  (via drill 0.35)
  Top 0.152: J1.10 84.25,11.46 84.8,10.91 96.21,10.91 96.4,11.1 96.4,13.64 TPEPDRST.TP 99.81,17.6 v98.4,17.6 | v17.9,64 U2.21
  Bottom 0.152: v98.4,17.6 85.19,17.6 38.8,64 v17.9,64
FLASH_CS  (via drill 0.35)
  Top 0.152: U2.12 23.59,47.43 23.59,47.22 26.89,43.91 R8.1 34.87,43.91 35.53,43.26 36.56,43.26 37.8,44.5 37.8,49.2 38.07,49.47 D10.2 39.13,50.97 38,52.1 v38,54 | v39,59.4 37.86,59.4 U1.1
  Bottom 0.152: v38,54 38,58.4 v39,59.4
GDR  (via drill 0.35)
  Top 0.152: Q3.1 64.17,15.1 | 64.17,15.1 64.17,12.94 R4.2 | J1.2 88.1,15.02 88.1,15.35 86.86,16.6 82.8,16.6 82.6,16.4 82.6,15.94 v82.31,15.65 | v64.9,13.4 64.9,14.37 64.17,15.1
  Bottom 0.152: v64.9,13.4 80.06,13.4 v82.31,15.65
GND  (via drill 0.3, 0.35)
  Top 0.127: U2.29_5 14.75,55.5 14.75,56.5 U2.29_6 | v13.25,51 13.25,54 U2.29_1 | U2.1 v9,46.75 | v37.25,55 37.75,55.5 U1.4 | v40,48.75 39.25,48 D10.1 | 80.75,21.75 79.5,21.75 79.25,21.5 79.25,21 78.5,20.25 78.5,20 EPD_C11.1 | 80.75,21.75 80.75,20.5 80.25,20 EPD_C10.1 | EPD_C9.1 83,21 83,21.5 | 83,21.5 83.25,21.75 84.5,21.75 | 84.5,21.75 87,21.75 87.5,21.25 EPD_C6.1 | v81.25,22.25 80.75,21.75 | 83,21.5 v82.75,21.75 | 84.5,21.75 84.5,20.75 83.75,20 EPD_C8.1 | U4.1 133.5,54.5 133.75,54.5 134.5,53.75 U4.9 | D8.1 53.5,38.75 54.75,37.5 54.75,34.5 53.5,34.5 51.75,36.25 51.75,38.25 51,39 D6.1 | v88.75,22 89.5,21.25 EPD_C5.1 | v46.75,42 46.75,39.25 D9.1 | U3.13 85.25,51.5 86,50.75 86,50.5 86.25,50.25 86.75,50.25 87.25,50.75 87.25,52.75 87.75,53.25 91.75,53.25 C8.2 | R2_BAT.1 114.25,51.5 114.25,50.5 111.75,48 111.75,47.5 112,47.25 120.25,47.25 120.75,46.75 121.25,46.75 C2_BAT.2 | v43.75,58 42,58 41.75,57.75 U1.9 | v79.75,23.75 78.25,23.75 76.25,21.75 76,21.75 75.75,21.5 75.75,20.75 76.5,20 EPD_C12.1 | v12,51 11.75,51.25 11.75,63.25 10.5,64.5 9.75,64.5 9,65.25 U2.28 9,67.25 v12.5,70.75 | v88.5,73.5 88.25,73.5 83.75,78 | 83.75,78 79.5,82.25 79.5,89 | 70.75,97.75 62.25,106.25 62.25,106.5 63,107.25 63.5,107.25 63.5,108.25 65,108.25 65,106.5 65.25,106.25 66.75,106.25 67,106.5 68.5,106.5 68.5,109 67.75,109 67.75,110.75 91.75,110.75 91.75,70.25 91.5,70.25 88.5,73.25 91.5,76.25 91.5,110.25 91.25,110.5 68.25,110.5 68,110.25 68,109.5 68.25,109.25 91,109.25 91.25,109 91.25,76.25 88.75,73.75 88.25,73.75 79.75,82.25 79.75,108.75 79.5,109 69,109 68.75,108.75 68.75,100.75 68.5,100.5 68.25,100.5 62.5,106.25 62.5,106.5 62.75,106.5 63,106.25 63.25,106.25 63.5,106.5 63.5,107 64.25,107.75 64.5,107.75 64.75,107.5 64.75,104.25 68,101 68.25,101 68.5,101.25 68.5,106 68.25,106.25 67,106.25 66.75,106.5 66,106.5 66,107 CHANGE_BUTTON.2
  Top 0.127: 70.75,97.75 79.5,89 | v54.75,108 57,108 57.25,107.75 57.25,107.5 56.75,107 55.25,107 54.5,107.75 54.5,108 54.75,108.25 57.5,108.25 57.75,108 57.75,107.75 56.75,106.75 55.25,106.75 54,108 54,108.25 54.25,108.5 57.75,108.5 58,108.25 58,107.75 56.75,106.5 55.25,106.5 53.75,108 53.75,108.5 54,108.75 57.75,108.75 58.25,108.25 58.25,107.75 56.75,106.25 55.25,106.25 53.5,108 53.5,108.75 53.75,109 57.75,109 58.75,108 56.75,106 54,106 53.25,106.75 53.25,107.5 53,107.75 53.25,108 53.5,107.75 53.5,106.75 53.25,106.5 52,106.5 51.75,106.25 50,106.25 50,108.25 48.75,108.25 48.5,108 48.5,106.5 48.25,106.25 47.75,106.25 47.5,106.5 47.25,106.5 47.25,106.25 47.75,105.75 56.75,105.75 59.25,108.25 59.75,108.25 60,108 61,108 61.25,107.75 61.25,107.25 62.25,107.25 CHANGE_BUTTON.1 | v54,107.25 54,106.25 53.75,106 47.75,106 47.5,106.25 47.75,106.5 48.25,106.5 48.25,107.25 47.75,107.25 47.25,107.75 46.75,107.75 46.5,108 44.25,108 44,107.75 28.25,107.75 28,108 27,108 26,107 BOOT_BUTTON.2 | 83.75,78 80,78 79.5,78.5 79.5,81.25 79.75,81.5 80,81.5 82.75,78.75 82.75,78.5 82.5,78.25 80,78.25 79.75,78.5 79.75,80.75 80,81 80.25,81 82.25,79 82.25,78.75 82,78.5 80.25,78.5 80,78.75 80,80.25 80.25,80.5 80.5,80.5 81.75,79.25 81.75,79 81.5,78.75 80.5,78.75 80.25,79 v80.25,80.25 | v50.5,98.75 51,98.25 C_DELAY.2 | 79.5,89 79.5,108.75 79.75,109 91,109 91.25,109.25 91.25,110 91,110.25 68.5,110.25 68.25,110 68.25,109.75 68.5,109.5 v91,109.5 | v14.25,83.5 16.25,85.5 J4.G1 | 70.75,97.75 70.75,108.5 70.5,108.75 69.25,108.75 69,108.5 69,99.75 70,98.75 70.25,98.75 70.5,99 70.5,108.25 70.25,108.5 69.5,108.5 69.25,108.25 69.25,99.75 69.75,99.25 70,99.25 70.25,99.5 70.25,108 70,108.25 69.75,108.25 69.5,108 v69.5,99.75
  Top 0.127: v54.75,47.25 v54.75,73.75 | v63.5,33.25 71,25.75 EPD_C1.1 | 70.75,97.75 79,97.75 79.25,98 79.25,108.5 79,108.75 70.75,108.75 69.75,107.75 69.75,100.5 v70,100.25 | v90,68 v90,70 | v119.5,42.25 118.5,42.25 IC4.2
  Top 0.3: U4.9 134.65,53.72 134.81,53.56 135.2,53.56 U4.6 | J4.P6 7.04,92.66 v7.6,92.1 | v3.1,94 3.04,94.06 J4.G4
  Bottom 0.127: v9,46.75 12.75,50.5 | 12.75,50.5 v13.25,51 15.25,49 29,49 33.5,53.5 | 33.5,53.5 35,55 v37.25,55 37.25,60 41.75,60 v43.75,58 | 33.5,53.5 35,52 39.5,52 40,51.5 v40,48.75 v46.75,42 | v88.75,22 83,22 v82.75,21.75 81.75,21.75 v81.25,22.25 v79.75,23.75 | 12.75,50.5 12.25,51 v12,51 | v12.5,70.75 12.5,68.75 18.75,68.75 18.75,69 19.25,69.5 22.25,69.5 22.75,70 23,70 23.25,69.75 91.75,69.75 91.75,110.75 67.75,110.75 67.75,108.5 59.5,108.5 59,108 58.75,108 58.5,108.25 57.75,108.25 23.25,73.75 23.25,73.5 v88.5,73.5 | v54,107.25 v54.75,108 | v80.25,80.25 80.25,98.75 v50.5,98.75 | v91,109.5 91,73 22.75,73 22.25,73.5 22.25,74 22.5,74.25 22.75,74.25 23,74.5 23,75 12.75,75 12.5,75.25 13.25,76 13.25,83.5 v14.25,83.5 | v69.5,99.75 69.5,99 50.5,99 50.25,98.75 50.25,73.75 v54.75,73.75 | v54.75,47.25 63.5,38.5 v63.5,33.25 | v70,100.25 79.5,109.75 91,109.75 91.25,109.5 91.25,70 v90,70 | v90,68 109.75,48.25 112.5,48.25 114.75,46 114.75,42.25 v119.5,42.25
  Bottom 0.3: v7.6,92.1 5.7,94 v3.1,94
  pour Bottom: 73.92,10.13 73.97,10.15 92.23,10.15 92.28,10.13 92.33,10.08 92.35,10.03 92.35,0.15 170.05,0.15 170.05,67.05 92.17,67.05 92.12,67.07 92.07,67.12 92.05,67.17 92.05,111.05 67.55,111.05 67.55,109.37 67.53,109.32 67.48,109.27 67.43,109.25 21.17,109.25 21.12,109.27 21.07,109.32 21.05,109.37 21.05,111.05 0.15,111.05 0.15,0.15 73.85,0.15 73.85,10.03 73.87,10.08
  pour Top: 73.92,10.13 73.97,10.15 92.23,10.15 92.28,10.13 92.33,10.08 92.35,10.03 92.35,0.15 170.05,0.15 170.05,67.05 92.17,67.05 92.12,67.07 92.07,67.12 92.05,67.17 92.05,111.05 67.55,111.05 67.55,109.37 67.53,109.32 67.48,109.27 67.43,109.25 21.17,109.25 21.12,109.27 21.07,109.32 21.05,109.37 21.05,111.05 0.15,111.05 0.15,0.15 73.85,0.15 73.85,10.03 73.87,10.08
GPIO8  (via drill 0.35)
  Top 0.152: U2.10 20.43,46.07 21.4,45.1 22.6,45.1 23,45.5 23.5,45.5 24,45 24,44.7 v23.5,44.2 | v22.7,40.8 22.15,40.8 R1.1
  Bottom 0.152: v23.5,44.2 22.7,43.4 v22.7,40.8
I2C_PW  (via drill 0.35)
  Top 0.3: v144.2,19.1 144.57,18.73 C1.1 146.43,18.73 148.41,16.75 148.41,16.44 SENSOR2.2 148.41,15.89 148.41,15.58 146.59,13.77 R1_PINH.2 146.59,13.25 SENSOR2.8 147.88,10.56 C2.1 148.28,8.5 150.6,8.5 151.19,9.09 R2_PINH.2 151.19,11.25 149.77,12.67 149.77,12.96 SENSOR2.6 | U2.17 22.9,65.62 v22.9,69.35
  Bottom 0.3: v144.2,19.1 96.53,66.77 92.2,66.77 92.02,66.77 89.5,69.3 22.95,69.3 v22.9,69.35
INT_RTC  (via drill 0.35)
  Top 0.152: U3.3 86.5,63.74 R1_PINH1.1 85.99,63.84 TPINTRTC.TP 53.71,45.5 v48.4,45.5 | U2.8 18.51,48.67 18.51,48.88 23.12,53.5 v34.3,53.5
  Bottom 0.152: v34.3,53.5 40.4,53.5 v48.4,45.5
IO/BOOT  (via drill 0.35)
  Top 0.152: U2.15 24.89,66.17 24.89,66.38 23.6,67.68 23.6,75 v23.48,75.12 | v19.4,110.4 20.72,109.08 C6.1 20.86,108.6 BOOT_BUTTON.4 BOOT_BUTTON.3 27.59,108.6 R_BOOT.1
  Bottom 0.152: v19.4,110.4 10.6,110.4 8.8,108.6 8.8,89.8 v23.48,75.12
IO/CHANGE  (via drill 0.35)
  Top 0.152: U2.23 15.97,66.17 15.97,66.38 22.8,73.22 v22.8,73.8 | v58.9,108.6 58.94,108.64 R_CHANGE.1 60.61,108.69 CHANGE_BUTTON.4 CHANGE_BUTTON.3 67.51,108.69 C10.1
  Bottom 0.152: v22.8,73.8 57.6,108.6 v58.9,108.6
MISO  (via drill 0.35)
  Top 0.152: v10.3,67.9 10.3,65.58 U2.27 10.89,64.93 10.89,64.72 17.41,58.2 U1.2 38.37,58.2 38.61,58.44 v38.68,58.44 | v49.1,36.4 49.7,36.4 | 49.7,36.4 D6.2 | 49.7,36.4 49.81,36.4 R5.1 | v7.35,71.7 7.27,71.78 TPMISO.TP 7.27,76.43 v7.2,76.5 | J4.P7 6.44,93.21 7.33,93.21 9.3,91.24 v9.3,77.2
  Bottom 0.152: v10.3,67.9 10.3,68.6 7.35,71.55 v7.35,71.7 | v49.1,36.4 49.1,45.8 38.82,56.08 38.82,58.3 v38.68,58.44 | v9.3,77.2 7.9,77.2 v7.2,76.5
MOSI  (via drill 0.35)
  Top 0.152: R6.1 54.03,36.83 D8.2 51.54,39.32 51.54,39.64 45.59,45.6 U1.5 41.45,51.52 v39.22,51.52 | v16.7,45.7 16.7,47.97 U2.7 17.24,48.67 17.24,48.88 17.9,49.55 v17.9,52.5 | v17.6,35.4 18.29,34.71 TPMOSI.TP 45.95,33.79 46.46,34.29 49.53,34.29 50.5,33.33 51.56,33.33 51.76,33.53 52.59,33.53 53.38,33.46 53.38,33.33 53.5,33.21 55.89,33.21 68.38,20.72 68.38,19.15 68.5,19.03 69.37,19.03 70.52,17.88 70.52,17.81 70.64,17.69 71.41,17.69 75.75,13.35 81.07,13.35 82.1,14.39 82.1,14.72 J1.14 | v7.2,69.6 5.89,70.91 5.89,85.77 4.94,86.73 4.94,88.29 5.89,89.25 J4.P3
  Bottom 0.152: 17.6,45.7 v16.7,45.7 | 17.6,45.7 v17.6,35.4 | 17.6,45.7 21.4,45.7 21.71,46.01 33.71,46.01 v39.22,51.52 | v7.2,69.6 11.8,65 11.8,58.6 v17.9,52.5
N$1
  Top 0.152: R2-USB1.2 158.36,51.6 160.51,51.6 161.8,52.89 162.31,52.89 J2.A5
N$2  (via drill 0.35)
  Top 0.152: J2.B5 162.31,55.89 161,55.89 158.81,53.7 v152.8,53.7 | v149.9,51.6 149.05,50.75 R2-USB.1
  Bottom 0.152: v152.8,53.7 150.7,51.6 v149.9,51.6
N$3  (via drill 0.35)
  Top 0.152: 116.9,41.6 D2.1 116.4,40.32 v116.4,40.2 | 116.9,41.6 118.43,41.6 IC4.3 | v119.6,45.2 118.49,44.09 IC4.1 118.04,42.99 117.96,42.99 116.9,41.94 116.9,41.6 | v131.4,46.6 131.8,47 131.8,47.87 Q1.2 | v115.4,39.3 115.3,39.2 115.3,38.1 115.5,37.9 116,37.9 116.2,38.1 C1_BAT1.1
  Bottom 0.152: v119.6,45.2 121,46.6 v131.4,46.6 | v116.4,40.2 115.5,39.3 v115.4,39.3
N$4
  Top 0.152: R1_BAT.2 120.6,48.33 120.6,47.4 120.79,47.2 122.3,47.2 124.06,48.96 MCP73831.1
N$5
  Top 0.152: D3.2 91.45,27.59 D4.1 93.31,30.59 C4.1
N$6
  Top 0.152: CHG_LED.C 118.08,51.36 R1_BAT.1
N$7  (via drill 0.35)
  Top 0.152: MCP73831.5 121.26,49.74 v120.4,50.6 | v117.3,52.9 116.2,52.9 115.69,52.39 R2_BAT.2
  Bottom 0.152: v120.4,50.6 119.6,50.6 v117.3,52.9
N$8
  Top 0.152: EPD_C12.2 77.25,20.38 J1.24
N$9
  Top 0.152: EPD_C10.2 78.92,20.09 78.92,19.43 78.25,18.76 J1.22
N$10
  Top 0.152: EPD_C8.2 82.5,19.89 82.5,19.42 79.25,16.16 J1.20
N$11
  Top 0.152: EPD_C7.2 84.4,19.88 84.4,19.41 84.2,19.2 82.8,19.2 79.75,16.15 J1.19
N$12
  Top 0.152: EPD_C6.2 85.09,17.35 82.4,17.35 80.4,15.35 80.4,15.02 J1.18
N$13  (via drill 0.35)
  Top 0.152: EPD_C2.2 71.96,18.24 v72,18.2 | v86,12.6 86.75,13.35 J1.5
  Bottom 0.152: v72,18.2 80.4,18.2 v86,12.6
N$14  (via drill 0.35)
  Top 0.152: EPD_C1.2 71.85,26.13 73.62,26.13 73.74,26.01 73.74,24.26 v75.1,22.9 | J1.4 87.4,14.72 87.4,14.39 88.38,13.4 v89.9,13.4
  Bottom 0.152: v89.9,13.4 90.2,13.7 90.2,14.5 88.1,16.6 82.79,16.6 80.63,18.76 79.24,18.76 v75.1,22.9
N$15
  Top 0.152: IC1.5 50.97,96.84 C_DELAY.1
N$16
  Top 0.152: D7.1 91.37,63 R_CAPACITOR.1
PREVGH  (via drill 0.35)
  Top 0.152: D5.1 81.73,30.57 v81.8,30.5 | J1.21 78.9,15.02 78.9,16.68 81.2,18.98 81.2,20.28 81.85,20.94 EPD_C9.2 81.8,21.2 v81.8,28.75
  Bottom 0.152: v81.8,30.5 v81.8,28.75
PREVGL  (via drill 0.35)
  Top 0.152: J1.23 77.75,19.29 77.61,19.43 77.61,20.51 EPD_C11.2 80.3,23.2 80.3,28.8 80.7,29.2 v86.3,29.2 | v87.3,30.3 88.5,30.3 89.1,29.7 89.1,29.2 88.63,28.73 D4.2
  Bottom 0.152: v86.3,29.2 87.3,30.2 v87.3,30.3
RESE  (via drill 0.35)
  Top 0.152: Q3.2 66.77,13.9 R3.2 75.79,11.94 75.97,11.77 79.07,11.77 v79.5,12.2 | v86.9,15.9 87.33,15.47 87.48,15.47 87.75,15.21 J1.3
  Bottom 0.152: v86.9,15.9 86.48,16.32 84.17,16.32 83.9,16.05 83.9,15.34 86.45,12.79 86.45,12.41 86.19,12.15 85.81,12.15 85.76,12.2 v79.5,12.2
RESE'
  Top 0.152: R2.2 69.52,15.28 68.9,15.9 65.83,15.9 65.8,15.93 62.73,15.93 62,15.2 62,11.73 SJ1.2 64.16,9.57 64.16,9.43 64.27,9.31 65.61,9.31 65.73,9.43 65.73,9.6 R3.1
RESET  (via drill 0.35)
  Top 0.152: U2.3 11.08,48.51 11.08,61.98 8.28,64.78 8.28,72.19 8.9,72.81 8.9,76.1 9.3,76.5 47.2,76.5 48.1,77.4 48.1,97 47.08,98.01 47,98.01 IC1.1 46.55,105.15 v45.9,105.8 | v43.9,108.3 44.21,108.61 R_RESET.1 47.36,108.61 RESET_BUTTON.4 RESET_BUTTON.3 52.48,108.65 C5.1
  Bottom 0.152: v45.9,105.8 43.9,107.8 v43.9,108.3
RTC_RST  (via drill 0.35)
  Top 0.152: v85.2,62.8 85.2,61.04 U3.4 | U2.16 24.86,64.93 24.86,64.72 24.98,64.6 42.8,64.6 v44.9,66.7
  Bottom 0.152: v44.9,66.7 81.3,66.7 v85.2,62.8
RX
  Top 0.152: TPRX.TP 14.08,72.18 U2.24
SCK  (via drill 0.35)
  Top 0.152: U2.6 15.97,48.67 15.97,48.88 17.45,50.36 17.45,52.69 17.71,52.95 18.09,52.95 19.45,51.6 20.82,51.6 23.01,53.78 32.88,53.78 36.7,57.6 39.6,57.6 39.79,57.79 39.79,59.79 39.91,59.91 43.47,59.91 43.59,59.79 43.59,58.92 44.35,58.16 | 44.35,58.16 U1.6 | U2.6 14.73,48.67 14.73,48.88 12.25,51.36 v12.25,62.3 | J4.P5 6.05,91.4 7.61,91.4 v7.86,91.16 | D9.2 45.62,36.26 45,36.26 | 45,36.26 R7.1 | 44.35,58.16 44.35,57.45 v44.2,57.3 | v44.2,53.5 44.2,37.06 45,36.26 | J1.13 82.6,14.72 82.6,14.39 78.57,10.35 73.85,10.35 73.65,10.15 73.65,5.77 68.88,1 15.3,1 14.7,1.6 14.7,33.08 TPSCK.TP 15.41,35.51 v15.5,35.6 | v15.6,45.8 15.6,47.8 U2.6
  Bottom 0.152: v44.2,53.5 v44.2,57.3 | v15.5,35.6 15.5,45.7 v15.6,45.8 | v12.25,62.3 12.08,62.48 12.08,65.12 12.05,65.15 12.05,75.35 12.78,76.08 12.78,85.42 8.52,89.68 8.52,90.49 v7.86,91.16
SCL  (via drill 0.35)
  Top 0.152: J3.4 165.19,20.9 | 165.19,20.9 149.09,37 148.68,37 147.57,38.1 v147.3,38.1 | v136.6,53.7 135.84,53.7 135.73,53.81 135.45,53.81 U4.7 136.87,53.97 137.5,54.6 137.5,59.4 135,61.9 126.97,61.9 116.24,51.17 116.24,51.12 116.12,51 115.5,51 v112.2,47.7 | v90.2,49.7 89.05,50.85 U3.16 | U2.20 19.2,65.59 19.2,68.76 v19.27,68.83 | R2_PINH.1 v152.49,14.79 v152.5,14.8 | v152.5,16.5 152.17,16.17 SENSOR2.4 | v163.9,20.9 165.19,20.9
  Bottom 0.152: v147.3,38.1 136.6,48.8 v136.6,53.7 | v112.2,47.7 92.2,47.7 | 92.2,47.7 v90.2,49.7 | 92.2,47.7 62.2,47.7 41.07,68.83 v19.27,68.83 | v152.5,14.8 152.5,15.7 | 152.5,15.7 v152.5,16.5 | 152.5,15.7 157.7,20.9 v163.9,20.9
SDA  (via drill 0.35)
  Top 0.152: U2.19 21.05,64.93 21.05,64.72 21.45,64.32 44.02,64.32 v45.12,65.42 | 144.5,15.07 141.63,15.07 118.05,38.65 118.05,39.12 117.93,39.24 116.34,39.24 114.47,41.12 114.47,41.51 113.09,42.89 112.22,42.89 112.1,43.01 112.1,44.6 105.66,51.04 92.19,51.04 90.39,49.25 87.55,49.25 87.3,49.5 | 144.5,15.07 R1_PINH.1 | 154.1,15.46 149.98,15.46 149.83,15.61 149.83,15.82 SENSOR2.3 149.48,17.28 149.5,17.3 v149.5,17.55 | 154.1,15.46 164.16,15.46 167.6,18.9 166.66,19.84 J3.3 | 144.5,15.07 144.9,14.67 144.9,9.6 147.2,7.3 152.2,7.3 153.6,8.7 153.6,14.96 154.1,15.46 | v136.5,54.5 136.47,54.47 U4.8 | v86,49.5 87.3,49.5 | 87.3,49.5 87.78,49.98 U3.15
  Bottom 0.152: v86,49.5 70.3,65.2 45.34,65.2 v45.12,65.42 | v136.5,54.5 149.5,41.5 v149.5,17.55
SRC  (via drill 0.35)
  Top 0.152: v66.7,34.2 66.7,34.3 72.48,34.3 L1.2 78.23,33.02 D5.2 80.47,36.92 81.07,37.52 82.78,37.52 87.09,33.21 92.14,33.21 C4.2 | v64.9,18.7 64.9,17.38 Q3.3
  Bottom 0.152: v66.7,34.2 64.9,32.4 v64.9,18.7
SS_SD  (via drill 0.35)
  Top 0.152: J4.P2 7.44,88.26 v7.5,88.2 | v7.6,99.7 8.76,100.86 R10.1 13.6,98.13 D12.2 | U2.4 12.19,48.67 12.19,48.88 11.36,49.72 11.36,62.1 10.3,63.16 v10.3,64
  Bottom 0.152: v10.3,64 8.13,66.17 8.13,68.03 6.75,69.41 6.75,74.55 7.1,74.9 11.2,74.9 12.5,76.2 12.5,83.2 v7.5,88.2 7.5,90.87 7.4,90.97 7.4,91.34 7.7,91.65 7.79,91.65 8.05,91.91 8.05,92.29 7.6,92.74 v7.6,99.7
TX
  Top 0.152: U2.25 12.81,67.97 12.95,68.11 12.95,71.79 TPTX.TP
USB_D+  (via drill 0.35)
  Top 0.152: U2.14 28.16,45.4 v28.4,45.4 | v154.4,46.3 153.67,47.03 D1.1
  Bottom 0.152: v28.4,45.4 37.7,45.4 52.6,30.5 61.7,30.5 66.3,35.1 67.3,35.1 85.24,17.16 88.33,17.16 88.39,17.1 151.9,17.1 154.9,20.1 154.9,45.8 v154.4,46.3
USB_D-  (via drill 0.35)
  Top 0.152: U2.13 24.86,47.43 24.86,47.22 24.98,47.1 25,47.1 v27.6,44.5 | v155.3,49 154.22,50.08 D1.3
  Bottom 0.152: v27.6,44.5 35,44.5 35.62,45.12 37.48,45.12 52.4,30.2 61.8,30.2 66.25,34.65 67.35,34.65 85.12,16.88 88.22,16.88 88.28,16.82 152.02,16.82 155.3,20.1 v155.3,49
VBAT  (via drill 0.35)
  Top 0.3: TPVBAT.TP 133.31,55.35 132.66,54.7 132.66,54.24 132.84,54.06 133.23,54.06 U4.2 U4.3 133.23,53.38 132.84,53.38 132.66,53.2 132.66,52.16 Q1.3 129.52,51.3 v129.3,51.3 | v126.5,51.3 124.4,51.3 MCP73831.3 123.66,51.24 123.34,51.24 122.34,50.23 122.34,49.35 121.25,48.26 C2_BAT.1
  Bottom 0.3: v129.3,51.3 v126.5,51.3
VBUS  (via drill 0.35)
  Top 0.3: TPVBUS.TP 152.05,57.33 152.05,49.66 151.88,49.5 151.54,49.5 D1.5 150.8,48.76 150.46,48.76 150.24,48.54 C5_USB.1 150.63,44.78 C4_USB.1 149.51,42.15 PFMF.050.1.2 138.77,39 131.7,46.07 131.18,46.07 130.87,46.38 130.87,46.9 Q1.1 128.24,49.53 R1_PWRUSB.2 127.43,52.19 123.34,52.19 122.79,51.64 MCP73831.4 CHG_LED.A 119.3,50.66 118.75,50.12 118.75,48.55 v117.9,47.7 | v115.2,45.3 115.2,43.78 D2.2 114.86,43.44 C1_BAT.1
  Bottom 0.3: v117.9,47.7 117.9,46.15 144.73,19.32 144.73,18.88 144.42,18.57 143.98,18.57 117.25,45.3 v115.2,45.3
VRTC
  Top 0.3: R_CAPACITOR.2 94.14,60.9 94.14,55.4 | 94.14,55.4 94.14,55.12 | C11.1 95.82,53.44 94.14,55.12 | C8.1 93.1,54.08 94.14,55.12 | 94.14,55.4 89.3,55.4 86.5,52.6 U3.14
VUSB
  Top 0.3: PFMF.050.1.1 162.82,47.81 164.15,47.81 164.9,48.56 164.9,50.99 163.82,52.08 | 163.82,52.08 163.26,52.08 163.22,52.04 J2.B9 J2.A4 | 163.82,52.08 163.65,52.24 163.65,55.97 163.08,56.54 J2.B4 J2.A9
(copper drawn outside any net)
  shapes: Top area x2